# Altium PCB Kasli_BP_Adapter.PCBDOC (part 2 of 3)
Units mil, origin at the board's own origin, x right, y up, seen from the top; angles counter-clockwise.
Board outline 2027.63 x 3937 mil, 4 copper layers (TopLayer, MP(G), MidLayer1, BottomLayer), stack 64.961 mil thick; 18 components, 82 nets, 256 pads, 42 vias.
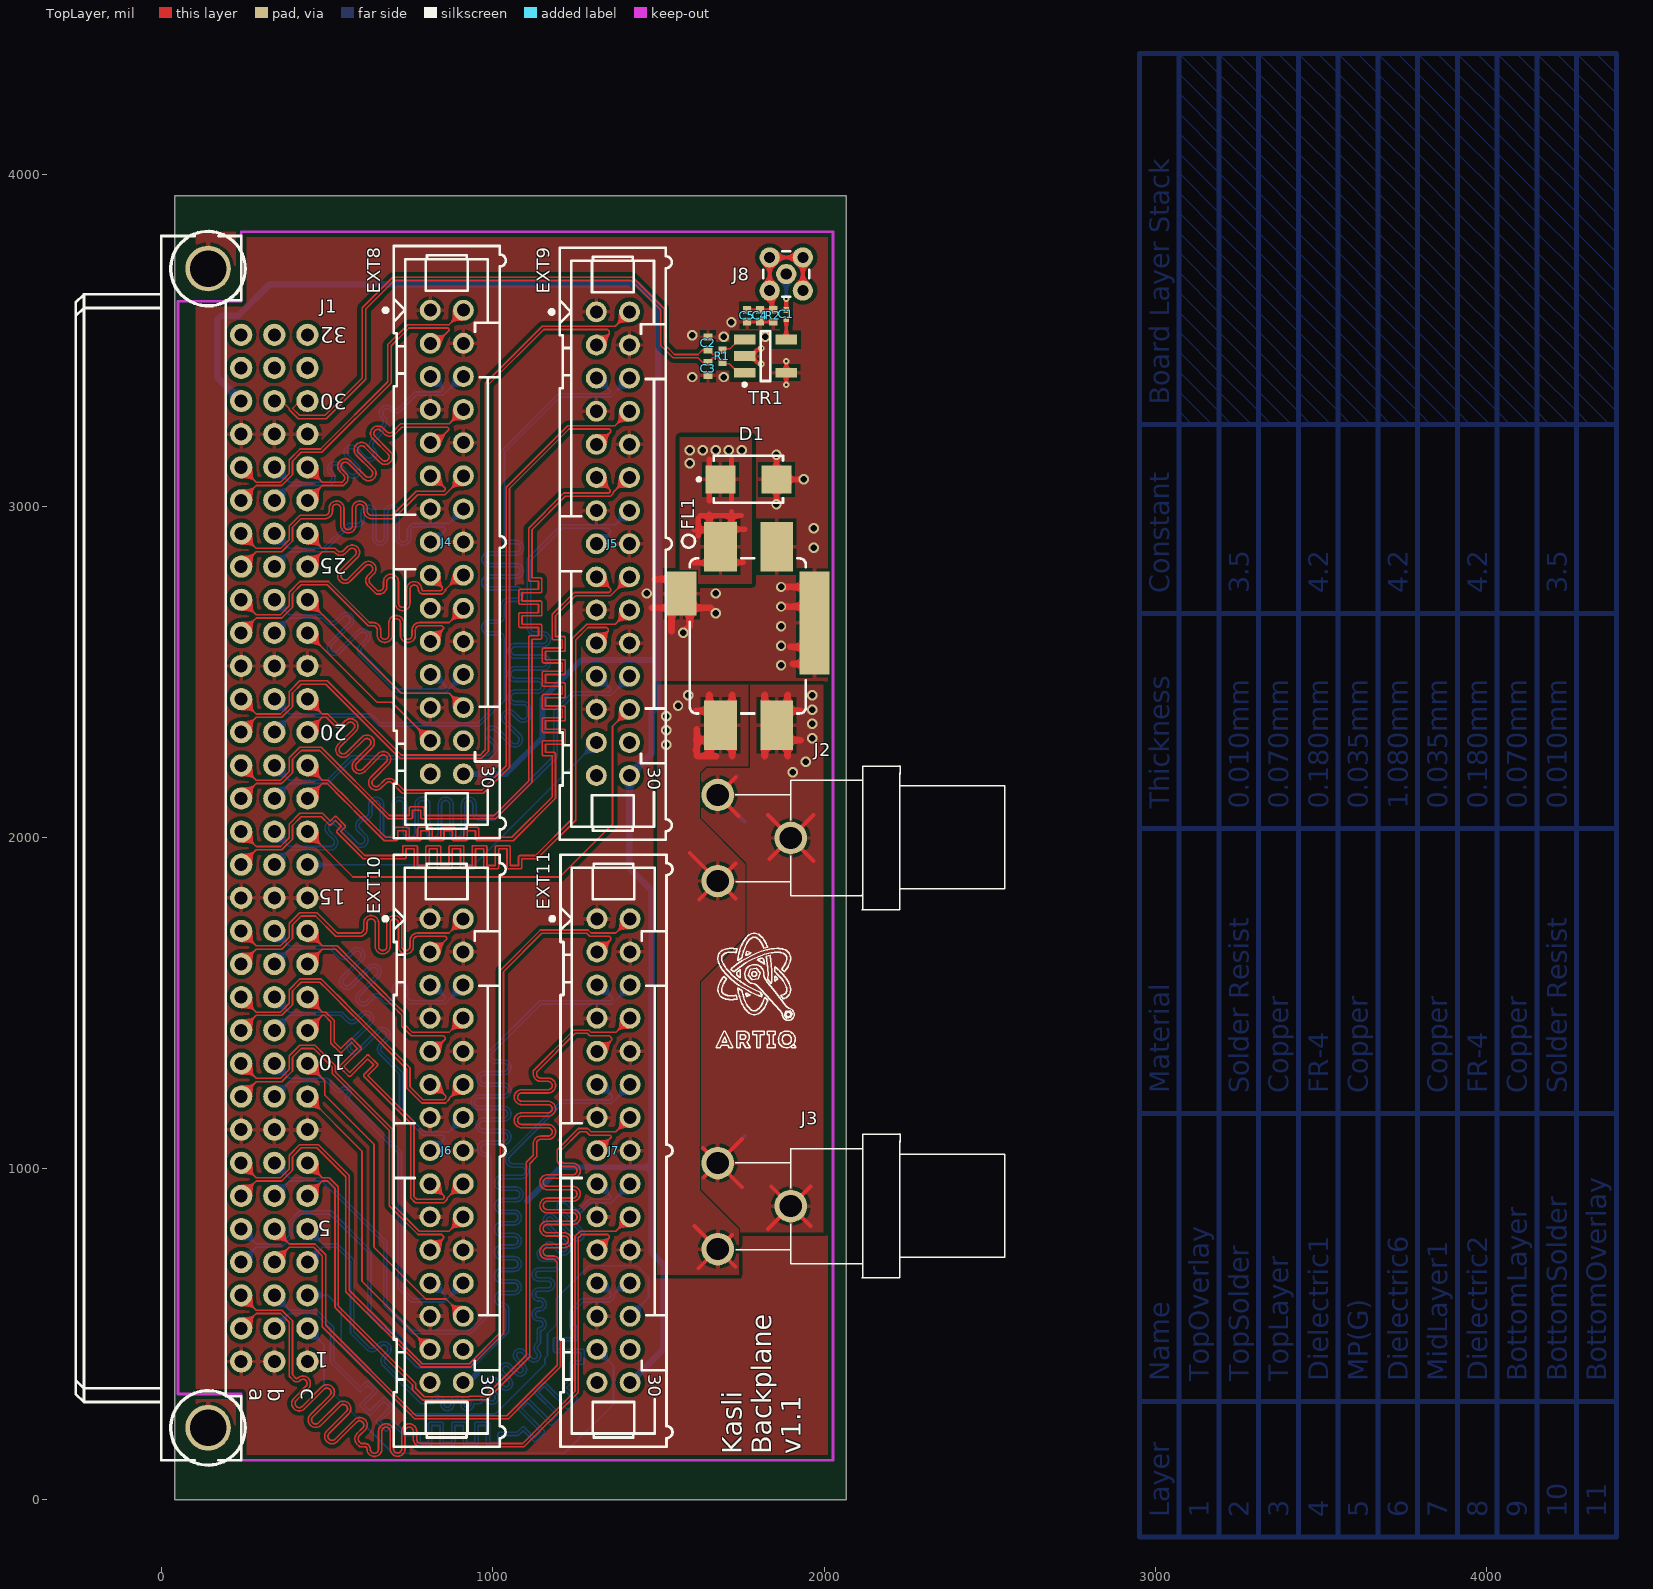
[diagram p0: TopLayer view]

## Via types
v1: diameter 31.5, hole 19.68, TopLayer to BottomLayer, tented both sides, 37 vias
v2: diameter 19.68, hole 7.87, TopLayer to BottomLayer, tented both sides, 5 vias

## Nets (pads, with @x,y where several pads share a name; then routed paths per layer and width w, separated by ;. In a path a pad name is that pad's centre, name@x,y a point inside that pad or via, vN(x,y) a via of type N, cw(c..) or ccw(c..) an arc to the next point about the centre after c; other vN are vias at no path point) (continued)
EXT9.LVDS_6_P: (continued)
  TopLayer w5: J1.a17@240.16,2017.32 285.16,1972.32 358.75,1972.32 385.12,1998.7 385.12,2040.02 417.39,2072.29 485.86,2072.29 508.98,2049.16 521.32,2061.5 cw(c524.86,2057.97) 528.4,2061.5 553.14,2036.76 cw(c549.61,2033.22) 554.61,2033.22 cw(c549.61,2033.22) 553.14,2029.68 540.8,2017.34 613.14,1945 727.5,1945 727.5,1970 cw(c732.5,1970) 732.5,1975 767.5,1975 cw(c767.5,1970) 772.5,1970 772.5,1915 797.5,1915 797.5,1970 cw(c802.5,1970) 802.5,1975 837.5,1975 cw(c837.5,1970) 842.5,1970 842.5,1915 867.5,1915 867.5,1970 cw(c872.5,1970) 872.5,1975 907.5,1975 cw(c907.5,1970) 912.5,1970 912.5,1915 937.5,1915 937.5,1970 cw(c942.5,1970) 942.5,1975 977.5,1975 cw(c977.5,1970) 982.5,1970 982.5,1915 1007.5,1915 1007.5,1970 cw(c1012.5,1970) 1012.5,1975 1047.5,1975 cw(c1047.5,1970) 1052.5,1970 1052.5,1915 1077.5,1915 1077.5,1940 cw(c1082.5,1940) 1082.5,1945 1129,1945 1240,2056 1240,2600.14 1283.28,2643.42 1369.41,2643.42 J5.20@1412.4,2686.42
EXT9.LVDS_7_N: J1.b16 J5.24 | length 2513.2
  BottomLayer w5: J1.b16@340.16,1917.32 385.16,1962.32 518.14,1962.32 524.91,1969.09 ccw(c509,1985) 531.5,1985 ccw(c509,1985) 524.91,2000.91 507.23,2018.59 cw(c516.07,2027.43) 507.23,2036.26 cw(c516.07,2027.43) 524.91,2036.26 585.01,1976.16 ccw(c600.92,1992.07) 616.83,1976.16 ccw(c600.92,1992.07) 623.42,1992.07 ccw(c600.92,1992.07) 616.83,2007.98 599.16,2025.66 cw(c607.99,2034.5) 599.16,2043.34 607,2051.18 612.43,2051.18 ccw(c612.43,2073.68) 634.93,2073.68 634.93,2098.68 cw(c647.43,2098.68) 659.93,2098.68 659.93,2013.68 ccw(c682.43,2013.68) 704.93,2013.68 704.93,2098.68 cw(c717.43,2098.68) 729.93,2098.68 729.93,2013.68 ccw(c752.43,2013.68) 774.93,2013.68 774.93,2098.68 cw(c787.43,2098.68) 799.93,2098.68 799.93,2013.68 ccw(c822.43,2013.68) 844.93,2013.68 844.93,2098.68 cw(c857.43,2098.68) 869.93,2098.68 869.93,2013.68 ccw(c892.43,2013.68) 914.93,2013.68 914.93,2098.68 cw(c927.43,2098.68) 939.93,2098.68 939.93,2073.68 ccw(c962.43,2073.68) 962.43,2051.18 1003.32,2051.18 1194,2241.86 1194,2378 1245.41,2429.41 1356.65,2429.41 1412.4,2485.17 J5.24@1412.4,2486.42
EXT9.LVDS_7_P: J1.b17 J5.23 | length 2493.5
  BottomLayer w5: J1.b17@340.16,2017.32 385.16,1972.32 514,1972.32 517.84,1976.16 ccw(c509,1985) 521.5,1985 ccw(c509,1985) 517.84,1993.84 500.16,2011.52 cw(c516.07,2027.43) 500.16,2043.34 cw(c516.07,2027.43) 531.98,2043.34 592.08,1983.23 ccw(c600.92,1992.07) 609.76,1983.23 ccw(c600.92,1992.07) 613.42,1992.07 ccw(c600.92,1992.07) 609.76,2000.91 592.08,2018.6 cw(c607.99,2034.5) 592.08,2050.41 602.86,2061.18 612.43,2061.18 ccw(c612.43,2073.68) 624.93,2073.68 624.93,2098.68 cw(c647.43,2098.68) 669.93,2098.68 669.93,2013.68 ccw(c682.43,2013.68) 694.93,2013.68 694.93,2098.68 cw(c717.43,2098.68) 739.93,2098.68 739.93,2013.68 ccw(c752.43,2013.68) 764.93,2013.68 764.93,2098.68 cw(c787.43,2098.68) 809.93,2098.68 809.93,2013.68 ccw(c822.43,2013.68) 834.93,2013.68 834.93,2098.68 cw(c857.43,2098.68) 879.93,2098.68 879.93,2013.68 ccw(c892.43,2013.68) 904.93,2013.68 904.93,2098.68 cw(c927.43,2098.68) 949.93,2098.68 949.93,2073.68 ccw(c962.43,2073.68) 962.43,2061.18 999.18,2061.18 1184,2246 1184,2382.14 1241.27,2439.41 1352.5,2439.41 1356.3,2443.21 1356.3,2447.83 J5.23@1317.72,2486.42
EXT10.LVDS_0_N: J1.a13 J6.3 | length 1129.1
  TopLayer w5: J1.a13@240.16,1617.32 285.16,1662.32 362.89,1662.32 395.19,1694.63 395.19,1735.95 421.53,1762.29 464.71,1762.29 526.06,1700.94 597.44,1700.94 ccw(c597.44,1723.44) 619.94,1723.44 619.94,1741.35 cw(c632.44,1741.35) 644.94,1741.35 644.94,1670.53 ccw(c667.44,1670.53) 689.94,1670.53 689.94,1741.35 cw(c702.44,1741.35) 714.94,1741.35 714.94,1670.53 ccw(c737.44,1670.53) 759.94,1670.53 759.94,1688.44 cw(c772.44,1688.44) 772.44,1700.94 857.13,1700.94 861.22,1696.85 861.22,1692.91 J6.3@829.72,1661.42
EXT10.LVDS_0_P: J1.a14 J6.2 | length 1145.9
  TopLayer w5: J1.a14@240.16,1717.32 285.16,1672.32 358.75,1672.32 385.19,1698.77 385.19,1740.09 417.39,1772.29 468.86,1772.29 530.2,1710.94 597.44,1710.94 ccw(c597.44,1723.44) 609.94,1723.44 609.94,1741.35 cw(c632.44,1741.35) 654.94,1741.35 654.94,1670.53 ccw(c667.44,1670.53) 679.94,1670.53 679.94,1741.35 cw(c702.44,1741.35) 724.94,1741.35 724.94,1670.53 ccw(c737.44,1670.53) 749.94,1670.53 749.94,1688.44 cw(c772.44,1688.44) 772.44,1710.94 857.13,1710.94 867.44,1710.94 J6.2@910.43,1753.94

## Text inside footprints (layer, text, board x,y; h text height)
J1: TopOverlay "20" at 559.84,2339.96 h47.24 r180; TopOverlay "15" at 555.91,1843.9 h47.24 r180; TopOverlay "a" at 263.78,337.01 h47.24 r270; TopOverlay "b" at 320.47,337.01 h47.24 r270; TopOverlay "c" at 420.47,337.01 h47.24 r270; TopOverlay "25" at 559.06,2842.52 h47.24 r180; TopOverlay "32" at 559.84,3539.96 h47.24 r180; TopOverlay "10" at 555.91,1343.9 h47.24 r180; TopOverlay "30" at 559.84,3339.96 h47.24 r180; TopOverlay "1" at 503.74,445.87 h47.24 r180; TopOverlay "5" at 511.61,841.93 h47.24 r180; Mechanical14 "a" at 263.78,337.01 h47.24 r270; Mechanical14 "b" at 320.47,337.01 h47.24 r270; Mechanical14 "c" at 420.47,337.01 h47.24 r270; Mechanical14 "30" at 559.84,3339.96 h47.24 r180; Mechanical14 "20" at 559.84,2339.96 h47.24 r180; Mechanical14 "15" at 555.91,1843.9 h47.24 r180; Mechanical14 "32" at 559.84,3539.96 h47.24 r180; Mechanical14 "1" at 503.74,445.87 h47.24 r180; Mechanical14 "25" at 559.06,2842.52 h47.24 r180; Mechanical14 "10" at 555.91,1343.9 h47.24 r180; Mechanical14 "5" at 511.61,841.93 h47.24 r180
J4: TopOverlay "30" at 966.02,2216.54 h40 r270; Mechanical14 "30" at 966.02,2216.54 h40 r270
J5: TopOverlay "30" at 1467.4,2211.42 h40 r270; Mechanical14 "30" at 1467.4,2211.42 h40 r270
J6: TopOverlay "30" at 965.43,378.94 h40 r270; Mechanical14 "30" at 965.43,378.94 h40 r270
J7: TopOverlay "30" at 1469.37,378.94 h40 r270; Mechanical14 "30" at 1469.37,378.94 h40 r270